# EAGLE board main (EAGLE 7.1.0)
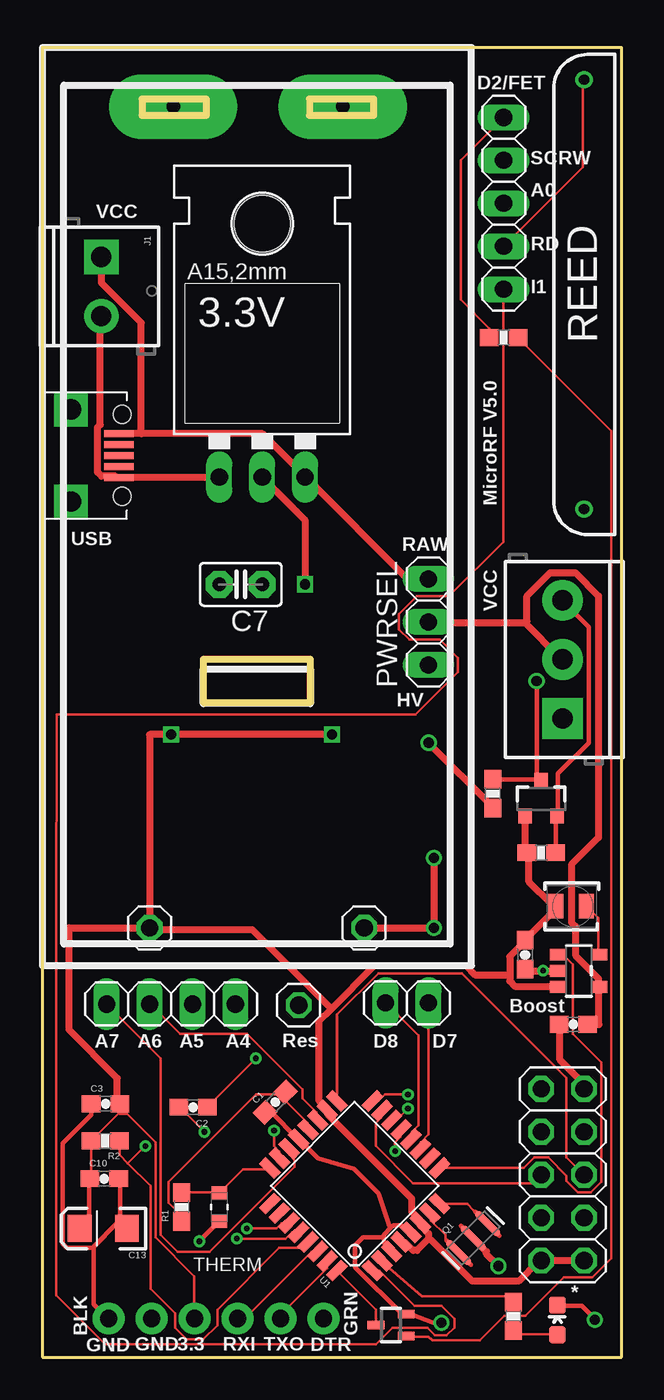
[diagram p0: board, top side]
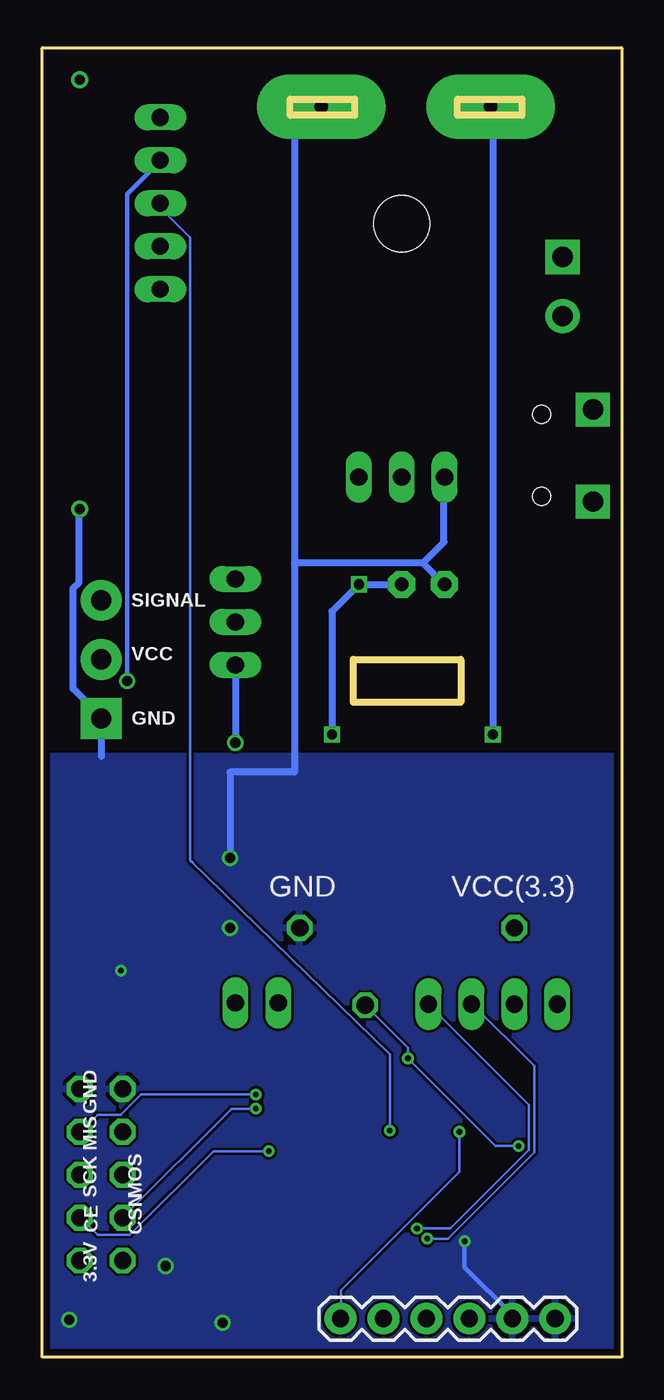
[diagram p1: board, bottom side, seen from below]

Size 34.29 x 77.47 mm. Coordinates in mm from the lower left corner, seen from the top.
Outline: 0,77.47 0,0 34.29,0 34.29,77.47 0,77.47
Outline: 9.53,41.27 9.53,38.73 15.88,38.73 15.88,41.27 9.53,41.27
Outline: 5.91,74.42 5.91,73.47 9.72,73.47 9.72,74.42 5.91,74.42
Outline: 15.81,74.42 15.81,73.47 19.62,73.47 19.62,74.42 15.81,74.42
Copper layers (1*16): Top 0.0356mm / dielectric 1.5011mm / Bottom 0.0356mm
Design rules "OSHParkDRU": minimum track width 6mil, minimum drill 13mil, track to track 6mil, track to pad 6mil, pad to pad 6mil, via to via 6mil, smd to smd 6mil, copper to edge 15mil, drill to drill 6mil, minimum pad ring 7mil, minimum via ring 7mil, stop-mask expansion 3mil, vias tented up to drill 0mil, thermal gap 10mil
Net classes: 0 default: width 0.152 mm; 1 vcc: width 0.406 mm; 2 GND: width 0.406 mm

## Footprints (pad centres in the part's own frame; a part is rotated, then mirrored left to right if it is on the bottom)
TO220L1 = drill 1.016 long: 1 -2.54,-3.81; 2 0,-3.81; 3 2.54,-3.81 | hole 3.302: 0,11.176
1X03 = drill 1.016 long: 1 -2.54,0; 2 0,0; 3 2.54,0
SOT23-5 = smd 0.7 x 1: 1 0.95,1.2; 2 0,1.2; 3 -0.95,1.2; 4 -0.95,-1.2; 5 0.95,-1.2
0603-CAP = smd 1.1 x 1: 1 -0.85,0; 2 0.85,0
C2.5-2 = drill 0.813 pad 1.6 octagon: 1 -1.27,0; 2 1.27,0
EIA3216 = smd 1.4 x 1.6: A 1.4,0; C -1.4,0
0603-LED-ALT1 = smd 1 x 1: A 0,-0.877; C 0,0.877
1X02 = drill 1.016 long: 1 -1.27,0; 2 1.27,0
1X01 = drill 1.016 octagon: 1 0,0
SCREWTERMINAL-3.5MM-2 = drill 1.2 pad 2.032 square: 1 0,0 | drill 1.2 pad 2.032: 2 3.5,0
1X06 = drill 1.016 pad 1.88: 1 0,0; 2 2.54,0; 3 5.08,0; 4 7.62,0; 5 10.16,0; 6 12.7,0
FCI-10103594-0001LF = smd 0.4 x 1.75: 1 -1.3,4.525; 2 -0.65,4.525; 3 0,4.525; 4 0.65,4.525; 5 1.3,4.525 | drill 1.2 pad 2 square: P$3 -2.725,1.7; P$4 2.725,1.7 | hole 1.05: -2.425,4.73; 2.425,4.73
1X04 = drill 1.016 long: 1 -3.81,0; 2 -1.27,0; 3 1.27,0; 4 3.81,0
SCREWTERMINAL-3.5MM-3 = drill 1.2 pad 2.413 square: 1 0,0 | drill 1.2 pad 2.413: 2 3.5,0; 3 7,0
2X05 = drill 1.016 octagon: 1 -5.08,-1.27; 2 -5.08,1.27; 3 -2.54,-1.27; 4 -2.54,1.27; 5 0,-1.27; 6 0,1.27; 7 2.54,-1.27; 8 2.54,1.27; 9 5.08,-1.27; 10 5.08,1.27
VLF302512MT = smd 0.9 x 1.45: 1 -0.4,0; 2 1.4,0
RESONATOR-SMD-1:1 = smd 0.45 x 1.905: 1 -1.2,0; 2 0,0; 3 1.2,0
SOT23-3 = smd 0.8 x 0.9: 1 -0.95,-1; 2 0.95,-1; 3 0,1.1
0603-RES = smd 1.1 x 1: 1 -0.85,0; 2 0.85,0
MK6-10 = drill 0.6 pad 1.016: 1 -12.7,0; 2 12.7,0
SOT323 = smd 0.5 x 1: 1 0,0.9; 2 -0.65,-0.9; 3 0.65,-0.9
RESC1608X95N = smd 0.762 x 0.94: 1 -0.838,0; 2 0.838,0
TQFP32-08 = smd 1.27 x 0.559: 1 -4.293,2.8; 2 -4.293,2; 3 -4.293,1.2; 4 -4.293,0.4; 5 -4.293,-0.4; 6 -4.293,-1.2; 7 -4.293,-2; 8 -4.293,-2.8; 17 4.293,-2.8; 18 4.293,-2; 19 4.293,-1.2; 20 4.293,-0.4; 21 4.293,0.4; 22 4.293,1.2; 23 4.293,2; 24 4.293,2.8 | smd 0.559 x 1.27: 9 -2.8,-4.293; 10 -2,-4.293; 11 -1.2,-4.293; 12 -0.4,-4.293; 13 0.4,-4.293; 14 1.2,-4.293; 15 2,-4.293; 16 2.8,-4.293; 25 2.8,4.293; 26 2,4.293; 27 1.2,4.293; 28 0.4,4.293; 29 -0.4,4.293; 30 -1.2,4.293; 31 -2,4.293; 32 -2.8,4.293
AAABATTERY = drill 0.8 pad 3.81 long: GND 16.51,-1.27; VCC 6.477,-1.27

## Placement (x,y rotation side)
3.3V  LD117V33  [TO220L1]  13.02,55.88 0 top
A0___D2  [1X03]  27.3,70.8 270 top
BST  XC9140  [SOT23-5]  31.75,22.86 90 top
C1  0.1uF  [0603-CAP]  13.79,15.09 45 top
C2  0.1uF  [0603-CAP]  8.93,14.8 180 top
C3  0.1uF  [0603-CAP]  3.75,14.99 0 top
C4  10uF  [0603-CAP]  31.43,19.68 0 top
C5  4.7uF  [0603-CAP]  28.57,23.81 90 top
C7  [C2.5-2]  11.75,45.72 180 top
C10  0.1uF  [0603-CAP]  3.67,10.57 0 top
C13  10uF  [EIA3216]  3.62,7.62 180 top
D3  Green  [0603-LED-ALT1]  30.48,2.21 0 top
D7-D1  [1X02]  27.3,64.45 270 top
D7-D8  [1X02]  21.59,20.95 0 top
GND  [1X01]  19.05,25.4 0 top
J1  [SCREWTERMINAL-3.5MM-2]  3.49,65.09 270 top
JP1  FTDI Basic  [1X06]  16.64,2.29 0 bottom
JP2  USB-RECEPTABLE  [FCI-10103594-0001LF]  0,53.34 270 top
JP3  [1X04]  7.62,20.89 0 top
JP4  [SCREWTERMINAL-3.5MM-3]  30.8,37.78 90 top
JP5  [2X05]  30.8,10.79 90 top
JP6  [1X01]  15.18,20.83 0 top
L1  VLF302512MT  [VLF302512MT]  30.8,26.67 0 top
PWRSEL  [1X03]  22.86,43.5 90 top
Q1  8/16/20MHz  [RESONATOR-SMD-1:1]  25.5,7.05 45 top
Q2  BSS138  [SOT23-3]  29.53,33.02 0 top
R1  10K 1%  [0603-RES]  8.26,8.89 90 top
R2  10K  [0603-RES]  3.72,12.8 180 top
R3  10K  [0603-RES]  27.3,60.33 180 top
R4  10K  [0603-RES]  29.53,29.84 0 top
R5  10K  [0603-RES]  26.67,33.34 90 top
R6  330  [0603-RES]  27.88,2.43 270 top
S3  REED-SWITCH-MK6-10  [MK6-10]  32.07,62.87 270 top
T1  [SOT323]  20.64,1.91 90 top
THERM  10K Ohms  [RESC1608X95N]  10.48,8.89 270 top
U1  ATMEGA328  [TQFP32-08]  18.49,10.15 135 top
U$1  BAT  [AAABATTERY]  1.27,75.25 0 top
VCC(3.3)  [1X01]  6.35,25.4 0 top

## Library data of the parts
3.3V = v-reg
A0___D2 D7-D1 D7-D8 GND JP3 JP5 JP6 PWRSEL VCC(3.3) = pinhead
BST = boost
C1-C5 C10 C13 JP1 Q2 R1-R6 U1 = SparkFun
C7 = capacitor-wima
D3 Q1 = Testing
J1 = SparkFun-Connectors; PROD_ID: CONN-08399
JP2 = daspilker
JP4 = SparkFun-Connectors
L1 = inductor-tdk
S3 = switch-reed; OC_FARNELL: unknown
T1 = zetex; MPN: DSS4160U-7; OC_FARNELL: 1710696; OC_NEWARK: 25R4558
THERM = Vishay_By_element14_Batch_1; MPN: NTCS0603E3103HMT; OC_FARNELL: 1874161; OC_NEWARK: 63H2050; SUPPLIER: Vishay; TOLERANCE: ± 3%; WATTAGE: 125 mW
U$1 = battery_wilkie

## Nets
3.3V [vcc]: 3.3V.2 BST.3 C3.2 C5.2 C7.1 C10.1 C13.A JP1.4 JP5.1 JP5.2 L1.1 Q2.1 R2.2 R4.1 U1.4 U1.6 U1.18 U$1.VCC VCC(3.3).1
A0: A0___D2.3 U1.23
A1: R1.2 THERM.1 U1.24
A2: U1.25
A3: U1.26
A4: JP3.4 U1.27
A5: JP3.3 U1.28
A6: JP3.2 U1.19
A7: JP3.1 U1.22
AREF: C1.2 R1.1 U1.20
BOOST_VCC [vcc]: BST.4 C4.2 JP4.2 PWRSEL.2
CE: JP5.3 U1.13
CSN: JP5.4 U1.14
D2_INT0: T1.1 U1.32
D2_VIA_FET: A0___D2.1 R3.2
D3_INT1: D7-D1.2 U1.1
D5: BST.1 U1.9
D7: D7-D8.2 U1.11
D8: D7-D8.1 U1.12
DTR [vcc]: C2.2 JP1.1
GND [vcc]: 3.3V.1 BST.2 C1.1 C3.1 C4.1 C5.1 C7.2 C10.2 C13.C D3.C GND.1 J1.2 JP1.5 JP1.6 JP2.5 JP4.1 JP5.9 JP5.10 Q1.2 S3.2 T1.3 THERM.2 U1.3 U1.5 U1.21 U$1.GND
HV [vcc]: PWRSEL.1 R5.1
HV_SIG1: A0___D2.2 Q2.3 R5.2
LED/D4: R6.1 U1.2
MISO: JP5.7 U1.16
MOSI: JP5.6 U1.15
N$1: Q1.3 U1.8
N$2: Q1.1 U1.7
N$6: R3.1 T1.2
N$7: D3.A R6.2
N$8: BST.5 L1.2
RAW_PWR [vcc]: 3.3V.3 J1.1 JP2.1 PWRSEL.3
REED: D7-D1.1 S3.1
RESET: C2.1 JP6.1 R2.1 U1.29
RXI: JP1.3 U1.30
SCK: JP5.5 U1.17
SCREW_TERM: JP4.3 Q2.2 R4.2
TXO: JP1.2 U1.31

## Tracks (layer width: path | path; a pad name or v marks a point on that pad's centre or on a via)
3.3V  (via drill 0.6)
  Top 0.152: 2.9,12.8 2.9,10.67 C10.1 | 2.9,12.8 4.53,14.44 | 4.53,14.44 4.57,14.48 4.57,14.94 C3.2 4.57,15.01 | 2.9,12.8 R2.2 | 6.1,25.38 6.33,25.38 VCC(3.3).1 6.4,25.38 | JP1.4 8.99,2.29 8.99,4.8 6.71,7.09 6.71,12.72 5.03,14.4 4.57,14.4 4.53,14.44
  Top 0.254: 21.24,6.8 U1.4 | C10.1 2.77,10.55 2.77,8.15 2.31,7.7 C13.A
  Top 0.406: 4.57,15.01 4.45,15.14 4.45,16.51 1.59,19.37 1.59,25.4 VCC(3.3).1 | 22.86,7.01 22.17,6.33 21.95,6.33 21.49,6.78 21.34,6.78 U1.4 | 22.86,7.01 22.86,7.32 22.4,7.77 U1.6 22.33,8.15 21.87,8.61 21.87,9.37 16.92,14.33 16.92,14.55 U1.18 16.76,14.78 16.38,15.16 16.38,19.89 17.11,20.61 | JP5.1 JP5.2 29.34,5.64 28.19,4.5 25.45,4.5 23.01,6.93 22.86,7.01 | 27.66,22.63 27.66,23.7 28.56,24.59 | 27.66,22.63 27.66,22.25 27.96,21.95 30.52,21.95 BST.3 | 28.57,24.61 28.56,24.59 | 27.66,22.63 25.6,22.63 25.07,23.16 19.66,23.16 17.11,20.61 | 17.11,20.61 12.42,25.3 6.48,25.3 VCC(3.3).1 | VCC(3.3).1 6.35,36.83 v7.62,36.83 v17.14,36.83 | v15.54,45.72 15.54,49.53 13.03,52.05 3.3V.2 | 28.56,24.59 28.57,24.57 C5.2 28.69,24.8 30.29,26.4 30.29,26.63 L1.1 30.18,26.75 28.8,28.12 28.8,29.72 R4.1 28.57,29.95 28.57,32 Q2.1
  Bottom 0.406: U$1.VCC 7.62,73.98 v7.62,36.83 | v17.14,36.83 17.14,44.12 v15.54,45.72 C7.1
A0  (via drill 0.33)
  Top 0.152: v13.72,13.41 13.72,12.5 14.02,12.19 14.02,11.81 U1.23
  Bottom 0.152: 27.28,68.2 A0___D2.3 | v13.72,13.41 13.72,17.91 25.53,29.4 | 25.38,29.25 25.53,29.4 | 27.28,68.12 A0___D2.3 | 27.28,68.05 A0___D2.3 | 25.53,29.4 25.53,66.22 27.28,67.97 A0___D2.3
A1
  Top 0.152: R1.2 8.31,9.75 10.44,9.75 THERM.1 10.52,9.75 11.89,11.12 13.41,11.12 U1.24
A4  (via drill 0.33)
  Top 0.152: v12.12,7.62 13.87,7.62 14.17,7.92 14.55,7.92 U1.27
  Bottom 0.152: v12.12,7.62 10.13,7.62 5.49,12.27 5.49,14.94 JP3.4
A5  (via drill 0.33)
  Top 0.152: v11.51,7.01 14.4,7.01 14.78,7.39 U1.28
  Bottom 0.152: v11.51,7.01 10.29,7.01 5.18,12.12 5.18,17.22 8.84,20.88 JP3.3
A6
  Top 0.152: U1.19 16.23,14.1 16.23,14.48 15.39,15.32 15.39,15.85 12.12,19.13 8.15,19.13 6.4,20.88 JP3.2
A7
  Top 0.152: U1.22 14.63,12.27 14.63,11.96 14.94,11.66 14.94,11.28 9.91,6.25 8,6.25 7.01,7.24 7.01,17.68 JP3.1
AREF
  Top 0.152: U1.20 15.7,13.49 15.7,13.87 14.33,15.24 14.33,15.54 C1.2 14.25,15.54 12.65,15.54 7.47,10.36 7.47,9.14 8.23,8.38 8.23,8.08 R1.1
BOOST_VCC
  Top 0.406: 28.57,43.43 22.86,43.43 PWRSEL.2 | 28.57,43.43 30.63,41.38 JP4.2 | C4.2 32.95,19.68 BST.4 32.92,22.06 32.92,22.4 31.55,23.77 31.55,25.49 31.32,25.72 31.32,29.15 32.92,30.75 32.92,45.03 31.55,46.41 30.06,46.41 28.69,45.03 28.69,43.55 28.57,43.43
CE  (via drill 0.33)
  Top 0.152: v20.88,12.19 20.88,12.72 21.18,13.03 21.18,13.41 U1.13
  Bottom 0.152: v20.88,12.19 24.16,12.19 29.11,7.24 31.01,7.24 32,8.23 JP5.3
CSN  (via drill 0.33)
  Top 0.152: v21.64,14.71 21.03,14.1 20.73,14.1 U1.14
  Bottom 0.152: v21.64,14.71 23.09,14.71 29.49,8.31 JP5.4
D2_INT0
  Top 0.152: T1.1 19.74,2.82 17.45,5.11 U1.32
D2_VIA_FET
  Top 0.152: R3.2 26.45,60.86 24.77,62.55 24.77,70.8 A0___D2.1
D3_INT1
  Top 0.152: U1.1 19.58,5.11 19.96,5.11 22.02,3.05 23.62,3.05 24.38,2.29 24.38,1.75 23.93,1.29 23.24,1.29 22.78,1.75 20.73,1.75 19.74,0.76 3.73,0.76 0.84,3.66 0.84,25.3 0.86,38.02 22.1,38.02 24.61,40.54 24.61,41.38 23.55,42.44 21.72,42.44 21.11,43.05 21.11,43.97 22.17,45.03 24.08,45.03 27.28,48.23 27.28,63.17 D7-D1.2
D5
  Top 0.152: U1.9 23.55,11.2 28.5,11.2 29.11,11.81 29.95,11.81 31.01,10.74 31.01,10.44 31.7,9.75 32.46,9.75 33.07,10.36 33.07,17.45 31.39,19.13 31.39,23.24 30.63,24 BST.1
D7
  Top 0.152: D7-D8.2 22.86,13.18 22.4,12.72 22.4,12.34 U1.11
D8
  Top 0.152: U1.12 21.87,12.95 21.87,13.34 22.25,13.72 22.25,19.05 20.34,20.95 D7-D8.1
DTR  (via drill 0.33)
  Top 0.152: v9.6,13.34 8.15,14.78 C2.2
  Bottom 0.152: v9.6,13.34 9.6,10.97 16.61,3.96 16.61,2.29 JP1.1
GND  (via drill 0.33, 0.6)
  Top 0.152: 23.46,1.92 23.47,1.91 v23.62,2.03
  Top 0.254: C10.2 4.6,10.55 4.6,8.04 4.94,7.7 C13.C 4.5,8 2.97,6.48 | 20.21,7.09 20.21,7.25 20.61,7.66 | 20.21,7.09 20.21,6.76 20.7,6.28 U1.3 | 20.61,7.66 20.78,7.82 21.26,7.82 21.75,7.33 U1.5 | 20.61,7.66 20.53,7.74 19.9,9.69 18.45,11.14 16.33,11.78 15.2,12.91 U1.21 15.09,12.95 13.56,14.48 13.26,14.48 C1.1 | 2.97,6.48 1.45,6.48 1.22,6.71 1.22,12.65 2.9,14.33 2.9,14.94 C3.1 | D3.C 30.48,3.05 31.93,3.05 32.69,2.29 v32.7,2.22 | 2.97,6.48 3.05,6.4 3.05,3.12 3.89,2.29 JP1.6 | 23.46,1.92 21.91,2.52 21.57,2.52 T1.3 21.41,2.52 21.34,2.52 18.52,5.33 18.52,6.63 18.97,7.09 20.21,7.09 | v9.3,6.86 10.44,8 THERM.2
  Top 0.406: v26.99,5.4 26.29,6.1 26.29,6.25 Q1.2 | JP5.9 32,15.93 32,16.23 30.63,17.6 30.63,19.66 C4.1 | GND.1 v23.18,25.4 v23.18,29.53 | v29.64,22.86 28.65,22.86 28.57,22.94 C5.1 | v29.64,22.86 BST.2 | v29.64,22.87 v29.64,22.86 | 10.52,51.89 3.3V.1 10.44,52.05 4.57,52.05 JP2.5 4.34,52.12 3.5,52.12 3.28,52.35 3.28,55.02 3.43,55.17 3.43,61.57 J1.2
  Bottom 0.254: 4.04,2.29 JP1.6 | v9.3,6.86 9.3,5.33 6.48,2.52 JP1.5
  Bottom 0.406: JP1.5 6.43,2.34 | 30.79,35.56 30.79,37.72 JP4.1 30.86,37.95 32.46,39.55 32.46,45.49 32.12,45.83 32.12,50.06 S3.2 | U$1.GND 19.37,73.98 19.37,46.98 | 19.37,46.98 19.37,34.61 23.18,34.61 v23.18,29.53 | 11.77,46.98 19.37,46.98 | 11.77,46.98 10.52,45.72 C7.2 | 11.77,46.98 10.52,48.23 10.52,52.01 3.3V.1
  pour Bottom: 0,35.56 0,0 34.29,0 34.29,35.56
HV  (via drill 0.61)
  Top 0.406: v22.86,36.35 26.63,32.58 R5.1
  Bottom 0.406: PWRSEL.1 v22.86,36.35
HV_SIG1  (via drill 0.61)
  Top 0.254: R5.2 26.75,34.18 29.49,34.18 Q2.3 29.26,34.29 v29.26,40.01
  Bottom 0.254: v29.26,40.01 29.26,68.81 27.32,70.75 A0___D2.2
LED/D4
  Top 0.152: R6.1 27.81,3.59 22.48,3.59 20.12,5.64 U1.2
MISO  (via drill 0.33)
  Top 0.152: v21.64,15.54 20.27,15.54 19.89,15.16 19.58,15.16 U1.16
  Bottom 0.152: v21.64,15.54 28.42,15.54 29.64,14.33 31.01,14.33 32,13.34 JP5.7
MOSI
  Top 0.152: U1.15 20.04,14.55 20.04,14.17 19.74,13.87 19.74,12.5 21.95,10.29 29.03,10.29 29.49,10.74 JP5.6
N$1
  Top 0.152: U1.8 23.55,9.07 25.15,9.07 25.53,8.69 25.63,8.62
N$2
  Top 0.152: U1.7 23.01,8.46 23.01,8.08 23.85,7.24 23.85,7.01 23.93,6.92
N$6
  Top 0.152: T1.2 21.57,1.22 22.86,1.22 23.09,0.99 25.91,0.99 27.36,2.44 28.57,2.44 30.86,4.72 32.54,4.72 33.68,5.87 33.68,54.8 R3.1
N$7
  Top 0.152: D3.A 30.48,1.37 28.04,1.37 27.89,1.52 R6.2
N$8
  Top 0.152: BST.5 32.92,23.85 32.92,25.98 32.23,26.67 L1.2
RAW_PWR
  Top 0.406: 5.87,54.63 13.03,54.63 15.54,52.12 3.3V.3 15.7,51.97 21.57,46.1 22.86,46.1 PWRSEL.3 | 5.87,54.63 4.57,54.63 JP2.1 | 5.87,54.63 5.87,61.19 3.5,63.55 3.5,65.08 J1.1
REED
  Top 0.152: S3.1 32,75.51 32,70.41 27.36,65.76 D7-D1.1
RESET  (via drill 0.33)
  Top 0.152: 5.07,11.47 6.4,10.13 6.4,4.04 7.85,2.59 7.85,1.75 8.53,1.07 9.53,1.07 10.36,1.91 10.36,2.82 14.02,6.48 15.39,6.48 15.7,6.78 U1.29 | 5.07,11.47 4.57,11.96 R2.1 | v12.65,17.68 9.83,14.86 C2.1 | v6.1,12.5 5.07,11.47
  Bottom 0.152: JP6.1 15.16,20.8 12.65,18.29 v12.65,17.68 7.47,12.5 v6.1,12.5
RXI
  Top 0.152: JP1.3 11.96,2.29 15.93,6.25 16.23,6.25 U1.30
SCK
  Top 0.152: U1.17 17.45,20.27 19.89,22.71 24.84,22.71 31.01,16.54 31.01,11.81 32,10.82 JP5.5
SCREW_TERM
  Top 0.254: R4.2 30.4,29.95 30.4,32 Q2.2 30.52,32.12 30.52,34.52 32.35,36.35 32.35,43.2 30.86,44.69 JP4.3
TXO
  Top 0.152: JP1.2 14.1,2.52 16.84,5.26 16.84,5.64 U1.31

## Text on the board
tPlace: D2/FET | SCRW | A0 | VCC | RD | I1 | REED | MicroRF V5.0 | USB | RAW | VCC | HV | Boost | A7 | A6 | A5 | A4 | Res | D8 | D7 | * | BLK | GND | GRN | GND | 3.3 | RXI | TXO | DTR
bPlace: SIGNAL | VCC | GND | GND | MIS | MOS | SCK | CE | CSN | 3.3V
tValues: Valid combinations: | 168V / 3.3V Reg / 8MHz | 168 / 5V Reg / 16MHz | 168 / 5V Reg / 20MHz | Mark back accordingly